# Altium PCB PCB1.PcbDoc (part 4 of 7)
Units mm, origin at the board's own origin, x right, y up, seen from the top; angles counter-clockwise.
Board outline 100 x 70 mm, 6 copper layers (Top Layer 1, GND_1, SIG, VCC, GND_2, Bottom Layer 1), stack 0.816 mm thick; 462 components, 328 nets, 2208 pads, 873 vias.
Unrouted connection lines stored in the file: 176.
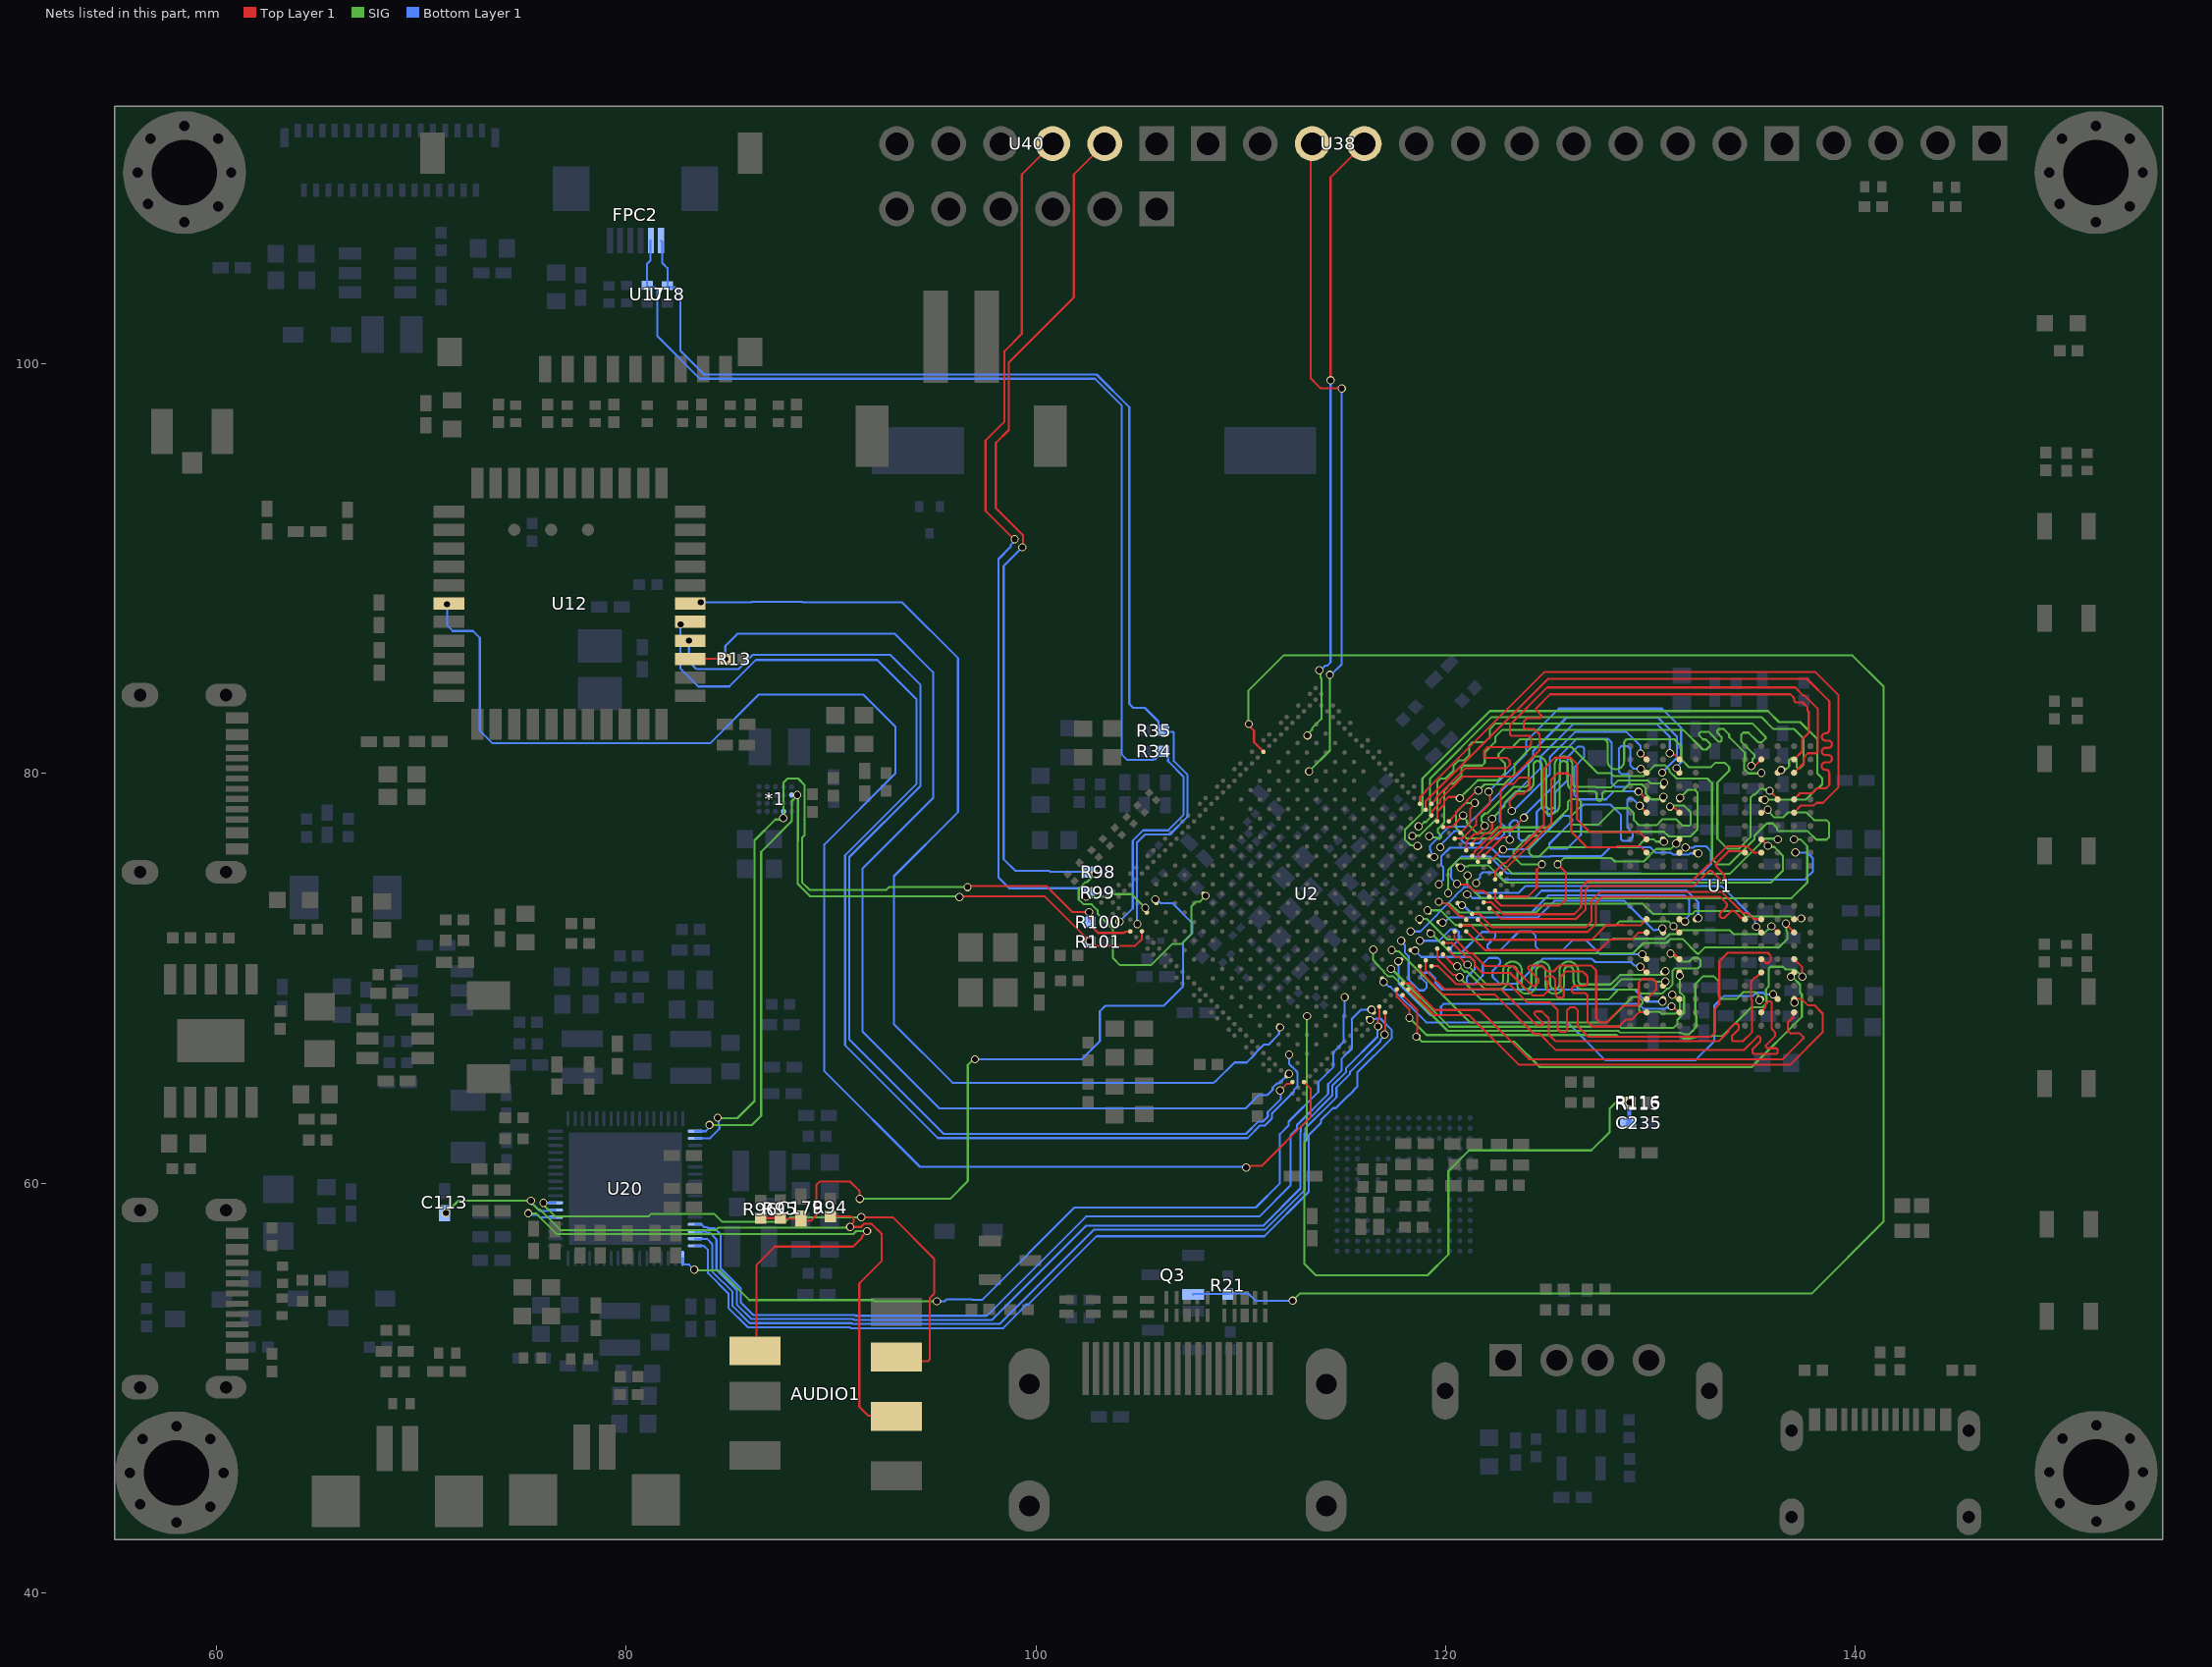
[diagram p8: the nets of this part, all layers, seen from the top]

## Via types
v1: diameter 0.4, hole 0.3, Top Layer 1 to Bottom Layer 1, tented both sides, 873 vias

## Nets (pads, with @x,y where several pads share a name; then routed paths per layer and width w, separated by ;. In a path a pad name is that pad's centre, name@x,y a point inside that pad or via, vN(x,y) a via of type N, cw(c..) or ccw(c..) an arc to the next point about the centre after c; other vN are vias at no path point) (continued)
HDMITX_SDA: Q3.2 R21.1 U2.AP11 | length 97.3
  Top Layer 1 w0.102: v1(110.398,82.413) 110.398,82.35 110.651,82.097 110.651,81.526 U2.AP11@111.118,81.059
  SIG w0.102: v1(110.398,82.413) 110.37,82.441 110.37,84.043 112.093,85.766 139.875,85.766 141.396,84.246 141.396,58.121 137.877,54.602 112.886,54.602 v1(112.537,54.254)
  Bottom Layer 1 w0.102: Q3.2@107.676,54.566 107.688,54.578 R21.1@109.374,54.578 109.406,54.61 110.363,54.61 110.719,54.254 v1(112.537,54.254)
HOST_WAKE_BT_H: U2.B36 U12.6 | length 76.4
  Top Layer 1 w0.102: v1(110.269,60.753) 110.326,60.81 110.475,60.81 110.508,60.843 111.029,60.843 113.411,63.225 113.411,64.624 U2.B36@113.098,64.937
  Bottom Layer 1 w0.102: v1(71.247,88.265) 71.247,87.239 71.526,86.961 72.517,86.961 72.848,86.63 72.848,82.092 73.463,81.477 84.082,81.477 86.458,83.852 91.568,83.852 93.148,82.272 93.148,80.019 89.668,76.539 89.668,65.465 94.335,60.797 110.225,60.797 v1(110.269,60.753)
HP_PLUG_IN_DET: C179.2 R95.1 R96.1 U2.1U19 | length 37
  Top Layer 1 w0.102: R96.1@86.564,58.291 87.515,58.291 R95.1@87.524,58.3 87.568,58.256 C179.2@88.519,58.256 88.609,58.166 89.028,58.166 89.282,58.42 89.282,59.912 89.441,60.071 90.932,60.071 91.397,59.606 v1(91.397,59.23)
  SIG w0.102: v1(91.397,59.23) 95.806,59.23 96.674,60.098 96.674,65.776 96.86,65.962 96.865,65.962 96.944,66.041 v1(97.025,66.041)
  Bottom Layer 1 w0.102: v1(97.025,66.041) 102.236,66.041 103.124,66.929 103.124,68.388 103.39,68.654 106.246,68.654 107.188,69.596 107.188,71.753 107.637,72.202 107.637,72.703 106.67,73.67 106.093,73.67 105.909,73.854 v1(105.829,73.854)
HP_SNS: AUDIO1.2 C113.2 R94.1 U20.40 | length 36.6
  Top Layer 1 w0.102: R94.1@89.967,58.374 90.578,58.374 90.582,58.378 90.974,58.378 91.108,58.244 91.108,58.099 90.987,57.979 90.987,57.881 v1@91.044,57.824 ; v1(90.93,57.858) 91.011,57.858 v1@91.044,57.824 ; AUDIO1.2@93.191,48.602 93.151,48.641 91.809,48.641 91.379,49.07 91.379,55.107 92.476,56.203 92.476,57.511 91.98,58.007 91.608,58.007 91.459,57.858 91.068,57.858 91.044,57.834 v1@91.044,57.824
  SIG w0.102: v1(71.196,58.536) 71.802,59.142 75.193,59.142 75.376,58.958 75.412,58.994 75.691,58.714 75.767,58.714 76.772,57.709 84.383,57.709 84.487,57.813 90.885,57.813 v1(90.93,57.858)
  Bottom Layer 1 w0.102: v1(75.345,59.142) 75.345,59.065 75.782,58.629 76.115,58.629 76.161,58.675 76.536,58.675 U20.40@76.545,58.684
HPL_OUT: AUDIO1.4 U20.39 | length 28.8
  Top Layer 1 w0.102: AUDIO1.4@86.291,51.802 86.36,51.871 86.36,56.007 87.249,56.896 91.078,56.896 91.511,57.328 91.511,57.4 91.754,57.644 v1(91.754,57.655)
  SIG w0.102: v1(75.21,58.521) 75.219,58.511 75.612,58.511 76.618,57.506 91.076,57.506 91.225,57.655 v1(91.754,57.655)
  Bottom Layer 1 w0.102: v1(75.21,58.521) 75.281,58.449 75.663,58.449 75.778,58.334 U20.39@76.545,58.334
HPR_OUT: AUDIO1.3 U20.41 | length 27.9
  Top Layer 1 w0.102: v1(91.472,58.332) 93.012,58.332 95.03,56.314 95.03,54.586 94.818,54.374 94.818,51.384 94.742,51.308 93.384,51.308 AUDIO1.3@93.191,51.502
  SIG w0.102: v1(75.949,59.031) 75.949,58.946 76.512,58.382 81.098,58.382 81.213,58.497 84.29,58.497 84.684,58.102 87.761,58.102 87.991,58.332 v1(91.472,58.332)
  Bottom Layer 1 w0.102: v1(75.949,59.031) 75.95,59.033 76.543,59.033 U20.41@76.545,59.034
HW_ID: C235.1 R115.1 R116.2 U2.1C17 | length 35.9
  SIG w0.102: v1(113.24,68.154) 113.235,68.15 113.235,62.099 113.109,61.973 113.109,56.055 113.665,55.499 119.126,55.499 120.142,56.515 120.142,60.579 121.158,61.595 127.127,61.595 128.016,62.484 128.016,63.627 128.329,63.94 v1(128.988,63.94)
  Bottom Layer 1 w0.203: C235.1@128.91,62.93 128.98,63 R115.1@128.98,63.881 128.98,63.933 v1(128.988,63.94)
I2C0_SCL_PMIC: *1.A3 R101.1 U2.AJ37 U20.1 | length 43
  Top Layer 1 w0.102: v1(96.273,73.968) 96.302,73.996 100.436,73.996 102.578,71.854 v1@102.578,71.782 ; v1(102.614,71.818) v1@102.578,71.782 ; U2.AJ37@105.179,72.291 105.179,71.92 104.845,71.587 102.881,71.587 102.685,71.782 v1@102.578,71.782
  SIG w0.102: v1(84.06,62.837) 84.073,62.825 86.117,62.825 86.583,63.29 86.583,76.178 88.078,77.674 88.078,78.651 88.311,78.883 v1@88.311,78.911 ; v1(88.349,78.949) v1@88.311,78.911 ; v1(96.273,73.968) 96.234,74.007 88.967,74.007 88.376,74.599 88.376,76.714 88.382,76.721 88.382,78.84 v1@88.311,78.911
  Bottom Layer 1 w0.102: U20.1@83.36,62.534 83.882,62.534 84.003,62.655 84.003,62.78 v1(84.06,62.837)
I2C0_SDA_PMIC: *1.B1 R100.1 U2.AK38 U20.2 | length 44.5
  Top Layer 1 w0.102: v1(96.663,74.454) 96.707,74.497 100.52,74.497 101.783,73.234 v1(102.599,73.234) 102.656,73.177 102.656,72.921 102.746,72.831 102.746,72.514 103.042,72.218 104.317,72.218 104.369,72.27 104.592,72.27 U2.AK38@104.613,72.291
  SIG w0.102: v1(84.462,63.188) 84.486,63.164 85.421,63.164 86.26,64.004 86.26,76.737 87.275,77.752 87.588,77.752 87.672,77.836 87.672,79.544 87.884,79.756 88.392,79.756 88.701,79.447 88.701,76.983 88.586,76.867 88.586,76.637 88.579,76.63 88.579,74.683 88.941,74.32 92.695,74.32 92.828,74.454 v1(96.663,74.454)
  Bottom Layer 1 w0.102: U20.2@83.36,62.184 83.367,62.192 84.095,62.192 84.547,62.644 84.547,62.818 84.519,62.847 84.519,63.131 v1(84.462,63.188) ; v1(102.599,73.234) 102.599,72.769 R100.1@102.615,72.754
  other v1: 87.664,77.829
I2C1_SCL_TP: FPC2.6 R35.1 U2.AK37 U18.2 | length 57.8
  Bottom Layer 1 w0.102: FPC2.6@81.697,106.031 81.762,105.966 81.762,104.928 82.011,104.679 U18.2@82.011,103.822 82.083,103.75 82.379,103.75 82.634,103.495 82.634,100.662 83.811,99.485 102.966,99.485 104.561,97.891 104.561,83.399 104.75,83.21 105.319,83.21 105.99,82.54 105.99,82.321 106.209,82.102 R35.1@106.222,82.102 106.282,82.042 106.681,82.042 106.741,81.982 106.741,80.606 107.409,79.937 107.409,77.889 106.542,77.022 105.323,77.022 104.933,76.632 104.933,72.672 v1(104.961,72.644)
I2C1_SDA_TP: FPC2.5 R34.1 U2.AM38 U17.2 | length 59.3
  Bottom Layer 1 w0.102: FPC2.5@81.197,106.031 81.18,106.013 81.18,105.056 81.013,104.889 U17.2@81.013,103.828 81.083,103.759 81.407,103.759 81.51,103.656 81.51,101.363 83.591,99.282 102.882,99.282 104.184,97.981 104.184,80.941 104.463,80.662 105.702,80.662 105.745,80.705 105.83,80.705 106.209,81.084 106.235,81.084 106.454,80.865 106.454,80.605 107.206,79.853 107.206,77.974 106.457,77.225 105.239,77.225 104.73,76.717 104.73,73.417 v1(104.087,72.774)
I2C2_SCL_M0: R99.1 U2.1U20 U40.3 | length 46.4
  Top Layer 1 w0.102: v1(98.967,91.44) 98.925,91.44 97.536,92.829 97.536,96.266 98.47,97.2 98.47,100.629 99.314,101.473 99.314,109.253 U40.3@100.822,110.761
  SIG w0.102: v1(102.447,73.986) 103.536,73.986 103.662,74.112 104.671,74.112 v1(105.34,73.443)
  Bottom Layer 1 w0.102: v1(98.967,91.44) 98.967,91.359 98.767,91.16 98.767,91.069 98.171,90.473 98.171,74.93 98.704,74.397 102.398,74.397 R99.1@102.6,74.194 102.6,74.139 v1(102.447,73.986)
I2C2_SDA_M0: R98.1 U2.1R16 U40.2 | length 54.8
  Top Layer 1 w0.102: v1(99.339,91.049) 99.365,91.075 99.365,91.643 98.044,92.964 98.044,96.139 98.679,96.774 98.679,100.076 101.854,103.251 101.854,109.253 U40.2@103.362,110.761
  SIG w0.102: v1(102.896,75.086) 102.512,74.703 102.422,74.703 102.095,74.376 102.095,73.84 102.325,73.61 102.721,73.61 103.013,73.319 103.013,73.163 103.759,72.417 103.759,70.993 104.113,70.639 105.619,70.639 106.666,71.685 107.12,71.685 107.598,72.164 107.598,73.524 107.821,73.746 108.014,73.746 v1(108.293,74.026)
  Bottom Layer 1 w0.102: v1(99.339,91.049) 98.425,90.135 98.425,75.819 98.994,75.25 100.66,75.25 100.716,75.194 R98.1@102.615,75.194
I2C3_SCL_M1: U2.1T4 U38.3 | length 32.6
  Top Layer 1 w0.102: U38.3@113.498,110.761 113.411,110.674 113.411,99.314 113.919,98.806 v1(114.935,98.806)
  SIG w0.102: v1(113.343,80.105) 114.358,81.12 v1(114.358,84.819)
  Bottom Layer 1 w0.102: v1(114.358,84.819) 114.41,84.819 114.935,85.344 v1(114.935,98.806)
I2C3_SDA_M1: U2.1V2 U38.4 | length 30.2
  Top Layer 1 w0.102: v1(114.388,99.202) 114.388,109.111 U38.4@116.038,110.761
  SIG w0.102: v1(113.257,81.861) 113.257,81.907 113.483,82.133 113.483,82.205 113.943,82.666 113.943,84.639 113.893,84.689 113.893,84.987 v1(113.837,85.042)
  Bottom Layer 1 w0.102: v1(113.837,85.042) 113.889,85.042 114.112,85.265 114.221,85.265 114.388,85.432 v1(114.388,99.202)
I2S1_LRCK_TX_M0_PMIC: U2.B24 U20.14 | length 45.5
  Bottom Layer 1 w0.102: U20.14@83.36,57.984 83.668,57.984 83.815,57.837 83.945,57.837 83.99,57.792 84.311,57.792 84.604,57.499 84.604,55.847 85.591,54.859 85.591,54.159 86.187,53.563 91.16,53.563 91.203,53.521 97.604,53.521 102.45,58.367 110.915,58.367 112.437,59.889 112.437,62.339 112.746,62.648 112.746,62.833 114.274,64.36 114.274,64.84 114.935,65.501 114.935,66.073 115.434,66.572 115.434,68.015 115.888,68.47 v1(116.387,68.47)
I2S1_MCLK_M0_PMIC: U2.A23 U20.16 | length 45.7
  Top Layer 1 w0.102: v1(117.03,67.26) 117.062,67.292 117.062,67.836 117.058,67.84 U2.A23@117.058,68.331
  Bottom Layer 1 w0.102: U20.16@83.36,57.284 83.367,57.277 83.947,57.277 84.192,57.032 84.192,55.684 85.185,54.691 85.185,53.99 86.018,53.157 90.992,53.157 91.034,53.114 98.222,53.114 102.825,57.717 111.184,57.717 113.12,59.653 113.12,62.424 113.153,62.457 113.153,62.664 114.68,64.192 114.68,64.671 115.341,65.333 115.341,65.43 116.816,66.905 116.816,66.977 117.03,67.191 v1(117.03,67.26)
I2S1_SCLK_TX_M0_PMIC: U2.B23 U20.15 | length 45.8
  Top Layer 1 w0.102: v1(116.71,67.646) 116.71,68.017 116.775,68.083 U2.B23@116.775,68.614
  Bottom Layer 1 w0.102: U20.15@83.36,57.634 83.861,57.634 83.906,57.589 84.06,57.589 84.401,57.247 84.401,55.762 85.388,54.775 85.388,54.074 86.103,53.36 91.076,53.36 91.118,53.318 97.857,53.318 102.46,57.92 111.1,57.92 112.917,59.737 112.917,62.509 112.949,62.541 112.949,62.748 114.477,64.276 114.477,64.755 115.138,65.417 115.138,65.604 116.678,67.144 116.678,67.614 v1(116.71,67.646)
I2S1_SDI0_M0/PDM: U2.1B14 U20.18 | length 43
  SIG w0.102: v1(83.317,55.776) 83.354,55.738 84.552,55.738 86.005,54.286 92.064,54.286 92.122,54.228 v1(95.17,54.228)
  Bottom Layer 1 w0.102: U20.18@82.752,56.327 82.752,56.045 82.775,56.022 82.982,56.022 82.988,56.016 83.059,56.016 83.3,55.776 v1(83.317,55.776) ; v1(95.17,54.228) 95.541,54.228 95.641,54.328 96.856,54.328 96.894,54.291 97.374,54.291 101.885,58.801 110.735,58.801 111.918,59.983 111.918,62.394 112.34,62.816 112.34,63.001 113.791,64.452 113.791,64.932 114.529,65.669 114.529,66.389 115.027,66.888 115.027,68.184 115.078,68.235 v1(115.078,69.074)
I2S1_SDO0_MO_PMIC: U2.B25 U20.17 | length 46.5
  Bottom Layer 1 w0.102: U20.17@83.36,56.934 83.782,56.934 83.989,56.727 83.989,55.6 84.982,54.607 84.982,53.906 85.934,52.954 90.908,52.954 90.95,52.911 98.405,52.911 99.293,53.799 99.293,53.833 99.531,54.071 99.626,54.071 102.959,57.404 111.158,57.404 113.323,59.569 113.323,62.34 113.914,62.931 113.914,63.069 114.505,63.659 114.643,63.659 115.277,64.294 115.299,64.294 115.506,64.5 115.506,64.523 115.699,64.716 115.699,65.407 117.383,67.091 117.383,67.472 116.822,68.032 116.619,68.032 116.602,68.016 116.374,68.016 v1(116.317,67.959)
I2S2_LRCK_TX_M0: U2.1D19 U12.28 | length 54.2
  Bottom Layer 1 w0.102: v1(83.639,88.364) 86.114,88.364 86.143,88.393 88.592,88.393 88.632,88.353 93.476,88.353 96.196,85.633 96.196,78.118 93.066,74.988 93.066,67.76 95.929,64.897 108.679,64.897 108.755,64.973 108.788,64.973 109.703,65.888 110.299,65.888 110.71,66.299 110.71,66.347 111.122,66.758 111.358,66.758 111.872,67.273 111.872,67.548 v1(111.929,67.605)
I2S2_SCLK_TX_M0: U2.C37 U12.26 | length 57.2
  Top Layer 1 w0.102: v1(111.916,64.517) 112.238,64.839 112.397,64.839 112.497,64.939 U2.C37@112.529,64.939
  Bottom Layer 1 w0.102: v1(83.058,86.487) 83.058,85.471 83.425,85.104 85.485,85.104 86.179,85.798 92.891,85.798 94.367,84.322 94.367,79.4 90.887,75.919 90.887,67.012 95.498,62.4 110.252,62.4 110.86,63.008 111.095,63.008 111.324,63.237 111.324,63.472 111.966,64.114 111.966,64.467 v1(111.916,64.517)
I2S2_SDI_M0: R13.1 U2.D37 U12.25 | length 55.6
  Top Layer 1 w0.102: U12.25@83.119,85.601 83.122,85.598 v1(84.836,85.598)
  Bottom Layer 1 w0.102: v1(84.836,85.598) 84.836,86.229 85.437,86.83 93.098,86.83 94.977,84.952 94.977,78.799 91.535,75.358 91.535,67.39 95.278,63.647 110.246,63.647 110.898,64.299 111.308,64.299 111.564,64.555 111.564,64.663 111.77,64.87 111.878,64.87 112.345,65.336 v1(112.361,65.336)
I2S2_SDO_M0: U2.1B20 U12.27 | length 60.6
  Bottom Layer 1 w0.102: v1(82.649,87.282) 82.649,85.118 83.515,84.252 85.033,84.252 86.327,85.546 92.254,85.546 94.164,83.636 94.164,79.484 90.684,76.003 90.684,66.732 95.218,62.197 110.337,62.197 110.944,62.805 111.179,62.805 111.527,63.153 111.527,63.387 112.601,64.461 112.601,64.545 112.776,64.721 112.776,65.405 112.713,65.468 112.713,65.482 112.547,65.648 112.53,65.648 112.363,65.815 v1(112.363,66.268)
LPDDR4_A0_A: U1.H2 U2.C2 | length 14.9
  Top Layer 1 w0.102: U2.C2@122.432,74.837 122.432,75.213 122.858,75.639 122.942,75.639 124.809,77.506 124.809,80.232 125.349,80.772 126.111,80.772 126.424,80.459 126.424,77.76 127.041,77.143 128.37,77.143 128.379,77.134 129.476,77.134 U1.H2@129.824,76.787
LPDDR4_A0_B: U1.R2 U2.A9 | length 9.5
  Top Layer 1 w0.102: U2.A9@121.018,72.291 121.929,71.38 127.514,71.38 128.023,71.889 128.263,71.889 128.297,71.923 129.138,71.923 129.451,72.237 U1.R2@129.824,72.237
LPDDR4_A1_A: U1.J2 U2.C1 | length 13.6
  Top Layer 1 w0.102: U2.C1@122.715,75.119 125.166,77.57 125.166,79.7 125.471,80.005 125.989,80.005 126.139,79.855 126.139,77.167 126.905,76.401 128.333,76.401 128.371,76.439 129.521,76.439 U1.J2@129.824,76.137
LPDDR4_A1_B: U1.P2 U2.B9 | length 9.8
  Top Layer 1 w0.102: U2.B9@120.735,72.574 121.246,72.574 121.937,71.882 127.136,71.882 127.852,72.598 128.68,72.598 128.693,72.584 129.521,72.584 U1.P2@129.824,72.887
LPDDR4_A2_A: U1.H9 U2.1C1 | length 18.5
  Top Layer 1 w0.102: U1.H9@135.424,76.787 135.429,76.787 135.747,76.469 v1(135.752,76.469)
  SIG w0.102: v1(120.745,75.401) 120.802,75.457 121.098,75.457 121.148,75.508 122.104,75.508 122.936,74.676 135.89,74.676 136.483,75.269 136.483,75.988 136.059,76.412 135.809,76.412 v1(135.752,76.469)
LPDDR4_A2_B: U1.R9 U2.1B7 | length 19.4
  Top Layer 1 w0.102: v1(135.169,72.514) 135.169,72.502 135.424,72.248 U1.R9@135.424,72.237
  Bottom Layer 1 w0.102: v1(118.296,72.291) 118.769,72.291 120.487,74.009 120.487,74.034 120.905,74.452 121.197,74.452 121.477,74.172 123.575,74.172 123.918,74.515 133.464,74.515 135.113,72.866 135.113,72.57 v1(135.169,72.514)
LPDDR4_A3_A: U1.H10 U2.1B3 | length 18.5
  SIG w0.102: v1(120.135,74.155) 120.134,75.288 120.701,75.855 122.519,75.855 123.261,75.113 133.897,75.113 135.606,76.822 136.178,76.822 v1@136.218,76.781
  other v1: 136.224,76.787
LPDDR4_A3_B: U1.R10 U2.1B6 | length 18.5
  Top Layer 1 w0.102: v1(135.915,72.543) 135.918,72.543 U1.R10@136.224,72.237
  SIG w0.102: v1(118.731,72.903) 118.733,72.9 119.084,72.9 120.091,71.893 128.144,71.893 128.18,71.93 130.713,71.93 130.843,72.06 130.846,72.06 130.942,72.156 131.354,72.156 131.544,72.346 133.872,72.346 134.057,72.161 135.533,72.161 v1(135.915,72.543)
LPDDR4_A4_A: U1.H11 U2.1B1 | length 20.2
  SIG w0.102: v1(121.075,75.023) 121.053,75.001 121.053,74.596 121.735,73.914 136.906,73.914 137.668,74.676 137.668,76.454 137.335,76.787 v1(137.024,76.787)
LPDDR4_A4_B: U1.R11 U2.1A6 | length 20.1
  Top Layer 1 w0.102: v1(136.622,72.673) 136.622,72.656 137.024,72.254 U1.R11@137.024,72.237
  SIG w0.102: v1(119.286,72.184) 119.322,72.184 120.287,71.218 129.164,71.218 129.672,71.727 130.8,71.727 130.995,71.921 131.571,71.921 132.283,71.208 132.368,71.208 132.675,71.516 136.286,71.516 136.703,71.933 136.703,72.27 136.652,72.321 136.652,72.643 v1(136.622,72.673)
LPDDR4_A5_A: U1.J11 U2.1A1 | length 18.7
  Bottom Layer 1 w0.102: v1(121.498,74.649) 121.498,74.73 121.684,74.916 121.684,75.034 121.834,75.184 122.428,75.184 122.79,74.822 137.547,74.822 137.945,75.22 137.945,75.854 137.656,76.143 v1(137.088,76.143)
LPDDR4_A5_B: U1.P11 U2.B8 | length 20.6
  Top Layer 1 w0.102: v1(119.675,73.741) 119.751,73.664 120.049,73.664 120.671,73.043 120.828,73.043 U2.B8@121.014,72.858 U2.B8@121.016,72.857 ; U1.P11@137.024,72.887 137.043,72.906 137.352,72.906 v1(137.372,72.926)
  SIG w0.102: v1(119.675,73.741) 119.751,73.664 120.062,73.664 120.089,73.638 120.233,73.638 120.658,73.214 124.419,73.214 124.843,73.638 129.644,73.638 130.145,73.137 132.049,73.137 132.202,73.29 134.402,73.29 134.677,73.015 136.146,73.015 136.157,73.025 136.851,73.025 136.969,72.908 137.354,72.908 v1(137.372,72.926)
LPDDR4_CKE0_A: U1.J4 U2.B4 | length 18.7
  Top Layer 1 w0.102: v1(120.565,74.61) 120.594,74.58 121.069,74.58 121.387,74.262 121.867,74.262 121.957,74.172 121.965,74.172 U2.B4@122.149,73.988 ; U1.J4@131.424,76.137 131.45,76.137 131.697,76.383 v1(131.724,76.383)
  Bottom Layer 1 w0.102: v1(120.565,74.61) 120.269,74.905 120.269,75.423 120.798,75.953 122.167,75.953 122.991,75.129 129.511,75.129 129.527,75.113 132.517,75.113 132.969,75.565 132.969,76.2 132.714,76.455 132.188,76.455 132.116,76.383 v1(131.724,76.383)
LPDDR4_CKE0_B: U1.P4 U2.1A3 | length 12.8
  Bottom Layer 1 w0.102: v1(120.8,73.57) 120.875,73.57 121.231,73.214 124.205,73.214 125.047,74.055 131.681,74.055 131.898,73.838 131.898,73.06 131.693,72.855 v1(131.693,72.774)
LPDDR4_CKE1_A: U1.J5 U2.1C3 | length 14.8
  Bottom Layer 1 w0.102: v1(119.674,74.589) 119.888,74.803 119.888,75.438 119.797,75.529 119.797,75.948 120.227,76.378 122.231,76.378 122.667,75.943 125.135,75.943 125.166,75.974 127.634,75.974 128.069,76.408 129.987,76.408 130.259,76.137 131.011,76.137 131.117,76.031 131.87,76.031 131.941,76.103 v1(132.354,76.103)
LPDDR4_CKE1_B: U1.P5 U2.1A2 | length 12.5
  Bottom Layer 1 w0.102: v1(121.051,74.099) 121.132,74.099 121.313,73.918 124.336,73.918 124.698,74.28 131.78,74.28 132.348,73.712 v1(132.348,72.937)
LPDDR4_CLK_A_N: U1.J9 U2.B5 | length 15.9
  Top Layer 1 w0.102: U2.B5@121.867,73.705 121.868,73.707 122.242,73.707 122.822,73.127 126.288,73.127 126.619,73.458 126.619,74.422 126.94,74.743 132.038,74.743 133.734,76.439 134.749,76.439 135.051,76.137 U1.J9@135.424,76.137
LPDDR4_CLK_A_P: U1.J8 U2.A5 | length 16
  Top Layer 1 w0.102: U2.A5@122.149,73.422 122.18,73.422 122.234,73.368 122.257,73.368 122.727,72.898 126.382,72.898 126.848,73.363 126.848,74.327 127.035,74.514 132.132,74.514 132.568,74.95 132.82,75.201 cw(c132.927,75.094) 133.035,75.201 133.371,74.866 ccw(c133.479,74.973) 133.586,74.866 ccw(c133.479,74.973) 133.586,75.081 133.251,75.417 cw(c133.358,75.525) 133.251,75.632 133.611,75.993 133.829,76.211 134.496,76.211 134.57,76.137 U1.J8@134.624,76.137
LPDDR4_CLK_B_N: U1.P9 U2.B7 | length 16.3
  Top Layer 1 w0.102: U2.B7@121.301,73.139 121.303,73.141 121.668,73.141 121.91,72.9 121.91,72.858 122.276,72.492 126.848,72.492 127.127,72.771 127.127,73.787 127.554,74.214 133.498,74.214 134.456,73.256 134.523,73.189 134.749,73.189 135.051,72.887 U1.P9@135.424,72.887
LPDDR4_CLK_B_P: U1.P8 U2.A7 | length 16.1
  Top Layer 1 w0.102: U2.A7@121.588,72.857 122.181,72.263 126.942,72.263 127.356,72.676 127.356,73.692 127.649,73.985 133.403,73.985 133.453,73.935 133.705,73.684 cw(c133.597,73.576) 133.705,73.469 133.438,73.202 ccw(c133.546,73.094) 133.438,72.987 ccw(c133.546,73.094) 133.654,72.987 133.92,73.253 cw(c134.028,73.145) 134.136,73.253 134.334,73.055 134.361,73.027 134.428,72.96 134.496,72.96 134.57,72.887 U1.P8@134.624,72.887
LPDDR4_CS0n_A: U1.H4 U2.B3 | length 12.4
  Top Layer 1 w0.102: U2.B3@122.432,74.271 122.432,73.82 122.7,73.552 125.578,73.552 125.883,73.858 125.883,75.158 v1(125.476,75.565)
  SIG w0.102: v1(125.476,75.565) 125.778,75.867 128.115,75.867 128.279,75.704 129.679,75.704 130.289,76.314 130.997,76.314 v1(131.262,76.579)
LPDDR4_CS0n_B: U1.R4 U2.1B5 | length 12.9
  Top Layer 1 w0.102: v1(131.138,72.536) 131.138,72.529 131.424,72.244 U1.R4@131.424,72.237
  SIG w0.102: v1(119.128,73.319) 119.765,73.319 120.485,72.598 128.323,72.598 128.512,72.787 130.888,72.787 v1(131.138,72.536)
LPDDR4_CS1n_A: U1.H3 U2.A3 | length 14.6
  Top Layer 1 w0.102: U2.A3@122.715,73.988 124.026,73.988 124.46,74.422 124.46,75.311 v1(124.714,75.565)
  SIG w0.102: v1(124.714,75.565) 123.698,75.565 123.317,75.946 123.317,76.2 124.079,76.962 124.466,76.962 124.526,76.902 124.526,76.818 124.079,76.371 124.079,76.122 124.255,75.946 124.587,75.946 125.042,76.401 127.451,76.401 127.459,76.408 129.367,76.408 129.746,76.787 130.172,76.787 130.284,76.674 130.655,76.674 v1(130.662,76.667)
LPDDR4_CS1n_B: U1.R3 U2.1A5 | length 11.8
  Bottom Layer 1 w0.102: v1(119.861,72.724) 119.937,72.724 120.184,72.971 124.515,72.971 125.322,73.778 128.734,73.778 130.161,72.351 130.263,72.351 130.289,72.377 130.541,72.377 v1(130.598,72.434)
LPDDR4_DM0_A: U1.C3 U2.1E2 | length 18
  Bottom Layer 1 w0.102: v1(119.445,75.919) 119.445,76 119.289,76.156 119.289,76.239 119.238,76.29 119.238,76.465 120.173,77.4 120.976,77.4 124.277,80.702 124.277,81.097 125.906,82.726 130.38,82.726 131.305,81.801 131.305,80.776 130.586,80.058 v1(130.586,80.043)
LPDDR4_DM0_B: U1.Y3 U2.1B8 | length 16.4
  Bottom Layer 1 w0.102: v1(117.836,71.831) 117.836,71.797 118.016,71.616 118.016,71.256 118.203,71.069 118.203,69.936 118.729,69.411 118.948,69.411 119.073,69.536 119.073,69.776 118.806,70.043 118.806,70.127 118.95,70.272 119.23,70.272 119.507,69.995 119.507,69.786 119.842,69.45 129.222,69.45 129.812,68.86 v1(130.595,68.86)
LPDDR4_DM1_A: U1.C10 U2.1G1 | length 25.9
  SIG w0.102: v1(118.689,77.413) 118.75,77.413 118.968,77.632 119.04,77.632 119.253,77.844 119.253,79.756 122.255,82.758 135.428,82.758 136.017,82.169 137.033,82.169 137.49,81.712 137.49,80.44 137.304,80.253 137.22,80.253 137.16,80.313 137.16,80.707 137.1,80.766 136.892,80.766 136.779,80.653 136.779,80.349 136.655,80.225 136.447,80.225 v1(136.39,80.168)
LPDDR4_DM1_B: U1.Y10 U2.1A11 | length 23.3
  Top Layer 1 w0.102: v1(136.004,69.215) 136.004,69.211 136.224,68.991 U1.Y10@136.224,68.987
  Bottom Layer 1 w0.102: v1(116.981,69.817) 117.02,69.817 117.25,69.588 117.322,69.588 119.064,67.845 125.957,67.845 127.796,66.006 132.204,66.006 133.122,66.925 133.122,68.653 133.61,69.141 135.016,69.141 135.166,69.29 135.429,69.29 135.433,69.294 135.517,69.294 135.596,69.215 v1(136.004,69.215)
LPDDR4_DQ0_A: U1.B2 U2.G2 | length 17.2
  Top Layer 1 w0.102: U2.G2@121.301,75.968 121.301,76.005 121.397,76.102 121.397,76.163 122.098,76.863 122.126,76.863 122.701,77.438 122.701,79.212 122.974,79.485 123.3,79.485 123.627,79.812 124.041,79.812 124.1,79.753 124.1,79.289 123.816,79.005 123.471,79.005 123.134,78.669 123.134,78.474 123.177,78.432 123.177,78.23 v1(123.234,78.173) ; v1@129.529,80.981 U1.B2@129.824,80.687
  Bottom Layer 1 w0.102: v1(123.234,78.173) 123.312,78.173 125.095,79.956 125.095,80.797 126.326,82.028 128.843,82.028 129.528,81.343 v1(129.528,80.981)
LPDDR4_DQ0_B: U1.AA2 U2.B12 | length 18.2
  Top Layer 1 w0.102: U2.B12@119.887,71.725 120.335,71.725 121.035,71.025 121.222,71.025 121.428,70.819 121.428,70.632 121.794,70.266 123.155,70.266 124.269,69.152 124.778,69.152 124.968,69.342 124.968,69.85 124.883,69.935 124.883,70.019 124.968,70.104 125.222,70.104 125.349,69.977 125.349,69.215 125.497,69.067 125.72,69.067 125.78,69.127 125.78,69.428 125.623,69.585 125.623,70.071 125.896,70.344 126.689,70.344 126.817,70.216 126.867,70.165 126.943,70.089 126.943,69.809 cw(c126.765,69.809) 126.767,69.631 126.33,69.627 ccw(c126.332,69.45) 126.154,69.448 ccw(c126.332,69.45) 126.333,69.272 126.764,69.275 cw(c126.765,69.098) 126.943,69.098 126.943,68.791 126.943,67.875 127.181,67.637 128.47,67.637 128.822,67.989 129.104,67.989 129.451,68.337 U1.AA2@129.824,68.337
LPDDR4_DQ1_A: U1.C2 U2.F2 | length 17.6
  Top Layer 1 w0.102: U2.F2@121.584,75.685 121.601,75.702 121.601,76.078 122.182,76.66 122.21,76.66 122.791,77.241 123.228,77.241 v1(123.829,77.842) ; v1(129.538,80.224) 129.587,80.224 129.774,80.037 U1.C2@129.824,80.037
  Bottom Layer 1 w0.102: v1(123.829,77.842) 123.858,77.871 123.858,77.96 125.603,79.705 125.603,80.887 126.401,81.685 127.952,81.685 128.112,81.525 128.112,79.528 128.288,79.352 128.816,79.352 128.985,79.521 128.985,79.882 128.892,79.975 128.586,79.975 128.482,80.079 128.482,81.232 128.584,81.334 128.899,81.334 129.032,81.201 129.032,80.391 129.186,80.237 129.524,80.237 v1(129.538,80.224)
LPDDR4_DQ1_B: U1.Y2 U2.B10 | length 18.1
  Top Layer 1 w0.102: U2.B10@120.452,72.291 120.449,72.288 120.449,71.922 121.14,71.23 121.304,71.23 121.937,70.597 123.274,70.597 124.264,69.607 124.348,69.607 124.533,69.792 124.533,69.968 124.048,70.454 124.048,70.538 124.127,70.617 124.709,70.617 124.991,70.335 125.283,70.335 125.569,70.621 127.118,70.621 127.359,70.38 127.359,68.047 127.566,67.84 127.857,67.84 128.682,68.665 129.385,68.665 129.444,68.725 129.444,69.79 129.618,69.964 130.128,69.964 130.302,69.79 130.302,69.465 129.877,69.04 129.877,68.987 U1.Y2@129.824,68.987
LPDDR4_DQ2_A: U1.E2 U2.F1 | length 17.7
  Top Layer 1 w0.102: U2.F1@121.867,75.968 122.775,76.876 123,76.876 123.101,76.775 v1(123.142,76.775) ; v1(129.428,79.113) 129.438,79.113 129.814,78.737 U1.E2@129.824,78.737
  Bottom Layer 1 w0.102: v1(123.142,76.775) 123.142,77.549 123.317,77.724 123.444,77.724 123.571,77.597 123.571,76.835 123.684,76.722 123.966,76.722 124.46,77.216 124.46,78.125 124.688,78.353 124.908,78.353 124.968,78.294 124.968,77.986 125.028,77.927 125.112,77.927 125.359,78.174 125.359,79.078 125.955,79.674 125.955,80.797 126.48,81.323 126.681,81.323 126.764,81.24 126.764,80.79 126.297,80.323 126.297,78.935 126.498,78.734 127.843,78.734 128.248,79.139 129.402,79.139 v1(129.428,79.113)
LPDDR4_DQ2_B: U1.V2 U2.1A8 | length 16.3
  Top Layer 1 w0.102: v1(129.519,70.565) 129.532,70.565 129.811,70.287 U1.V2@129.824,70.287
  Bottom Layer 1 w0.102: v1(118.518,71.347) 118.822,71.044 121.203,71.044 121.428,70.819 121.428,70.445 121.042,70.059 121.042,69.783 121.101,69.723 121.412,69.723 121.82,70.131 121.82,70.699 122.114,70.993 122.555,70.993 122.682,70.866 122.682,70.739 122.302,70.359 122.302,70.072 122.63,69.744 123.536,69.744 124.746,70.953 127.156,70.953 127.32,70.79 129.056,70.79 129.223,70.622 129.462,70.622 v1(129.519,70.565)
LPDDR4_DQ3_A: U1.F2 U2.E1 | length 17.3
  Top Layer 1 w0.102: U2.E1@122.149,75.685 122.759,76.295 v1(122.813,76.295) ; v1(129.486,78.419) 129.489,78.419 129.821,78.087 U1.F2@129.824,78.087
  Bottom Layer 1 w0.102: v1(122.813,76.295) 124.079,76.295 125.718,77.935 126.023,77.935 126.189,77.769 126.189,77.685 125.073,76.569 125.073,76.395 125.133,76.335 125.95,76.335 126.619,77.005 126.619,78.359 126.746,78.486 128.055,78.486 128.104,78.437 128.111,78.437 128.577,77.97 128.577,76.782 128.651,76.708 128.973,76.708 129.141,76.876 129.141,77.107 128.875,77.373 128.875,78.701 128.935,78.76 129.145,78.76 v1(129.486,78.419)
LPDDR4_DQ3_B: U1.U2 U2.1A7 | length 16.3
  Top Layer 1 w0.102: v1(129.616,71.172) 129.616,71.158 129.824,70.951 U1.U2@129.824,70.937
  Bottom Layer 1 w0.102: v1(118.755,71.831) 119.688,71.831 120.247,72.39 120.523,72.39 120.65,72.263 120.65,71.882 120.269,71.501 120.269,71.307 120.329,71.247 120.777,71.247 121.793,72.263 122.368,72.263 122.428,72.203 122.428,72.009 122.047,71.628 122.047,71.501 122.174,71.374 122.682,71.374 123.61,72.302 124.185,72.302 124.394,72.093 124.394,71.563 124.584,71.374 125.73,71.374 126.238,71.882 126.845,71.882 127.555,71.173 v1(129.616,71.172)
LPDDR4_DQ4_A: U1.F4 U2.M2 | length 19
  Top Layer 1 w0.102: U2.M2@119.887,77.382 120.308,77.382 120.585,77.659 120.585,77.676 v1(120.862,77.953) ; v1(130.963,78.384) 131.02,78.327 131.183,78.327 U1.F4@131.424,78.087
  SIG w0.102: v1(120.862,77.953) 120.862,77.872 121.054,77.68 121.054,77.574 121.54,77.088 122.266,77.088 122.547,77.368 125.087,77.368 125.984,78.265 125.984,78.613 126.111,78.74 126.492,78.74 126.619,78.613 126.619,78.397 126.096,77.874 126.096,77.606 126.208,77.494 127.454,77.494 128.263,78.303 128.961,78.303 129.197,78.067 129.197,77.729 129.456,77.47 130.302,77.47 130.604,77.772 131.257,77.772 131.578,77.452 131.921,77.452 131.98,77.511 131.98,78.101 131.651,78.43 131.009,78.43 v1(130.963,78.384)
LPDDR4_DQ4_B: U1.U4 U2.B13 | length 18
  Top Layer 1 w0.102: U2.B13@119.604,71.442 119.604,70.945 120.388,70.162 120.51,70.162 120.609,70.062 v1(120.69,70.062) ; v1(130.988,71.204) 131.045,71.147 131.206,71.147 131.416,70.937 U1.U4@131.424,70.937
  SIG w0.102: v1(120.69,70.062) 120.69,70.026 121.755,68.961 127.952,68.961 128.441,69.45 129.355,69.45 129.553,69.252 130.57,69.252 130.806,69.488 130.881,69.488 131.092,69.699 131.092,70.379 131.198,70.485 132.334,70.485 132.461,70.612 132.461,70.866 132.334,70.993 132.08,70.993 131.899,70.812 131.421,70.812 131.029,71.204 v1(130.988,71.204)
LPDDR4_DQ5_A: U1.E4 U2.K1 | length 19
  Top Layer 1 w0.102: U2.K1@120.735,77.099 121.215,77.579 121.215,78.281 121.431,78.497 v1(121.431,78.564) ; U1.E4@131.424,78.737 131.424,78.786 v1(131.461,78.824)
  SIG w0.102: v1(121.431,78.564) 120.975,78.564 120.51,78.099 120.51,77.356 121.031,76.835 122.301,76.835 122.631,77.165 126.792,77.165 126.804,77.153 130.673,77.153 130.9,76.926 131.192,76.926 131.197,76.931 131.975,76.931 132.305,77.261 132.305,79.082 132.186,79.201 131.838,79.201 v1(131.461,78.824)
LPDDR4_DQ5_B: U1.V4 U2.1A10 | length 17.8
  SIG w0.102: v1(117.337,70.453) 117.376,70.453 120.192,67.637 128.53,67.637 128.595,67.572 131.127,67.572 131.333,67.779 131.333,67.989 131.648,68.304 131.648,69.117 131.44,69.326 131.44,70.112 v1(131.444,70.117)
LPDDR4_DQ6_A: U1.C4 U2.K2 | length 17.4
  Top Layer 1 w0.102: U2.K2@120.452,76.816 120.473,76.837 120.844,76.837 121.491,77.485 121.491,77.853 122.171,78.533 122.171,78.901 122.161,78.91 122.161,79.057 v1(122.104,79.114) ; v1(131.285,80.257) 131.285,80.216 131.424,80.077 U1.C4@131.424,80.037
  Bottom Layer 1 w0.102: v1(122.104,79.114) 123.952,80.961 123.952,81.587 125.533,83.169 130.578,83.169 131.508,82.238 131.508,80.532 131.285,80.308 v1(131.285,80.257)
LPDDR4_DQ6_B: U1.Y4 U2.1B9 | length 18.3
  Top Layer 1 w0.102: v1(131.074,69.193) 131.131,69.136 131.221,69.136 131.37,68.987 U1.Y4@131.424,68.987
  SIG w0.102: v1(117.376,71.372) 117.433,71.315 117.72,71.315 121.194,67.84 127.892,67.84 129.148,69.096 129.422,69.096 129.633,68.885 129.633,68.8 129.456,68.623 129.456,68.429 129.515,68.37 130.437,68.37 130.53,68.277 131.239,68.277 131.445,68.483 131.445,68.821 v1(131.074,69.193)
LPDDR4_DQ7_A: U1.B4 U2.1E1 | length 17.5
  Top Layer 1 w0.102: v1(130.953,80.996) 131.01,80.939 131.171,80.939 U1.B4@131.424,80.687
  Bottom Layer 1 w0.102: v1(119.749,76.398) 119.749,76.479 119.806,76.536 119.806,76.559 120.434,77.187 120.686,77.187 120.845,77.028 120.845,76.896 120.78,76.831 120.78,76.746 120.934,76.593 121.644,76.593 121.871,76.819 122.65,76.819 122.858,77.027 122.858,77.441 122.642,77.657 122.642,78.264 124.65,80.272 124.65,80.835 126.228,82.413 130.335,82.413 130.953,81.796 v1(130.953,80.996)
LPDDR4_DQ7_B: U1.AA4 U2.1A9 | length 16.2
  Top Layer 1 w0.102: v1(131.04,68.629) 131.086,68.629 131.378,68.337 U1.AA4@131.424,68.337
  Bottom Layer 1 w0.102: v1(117.702,70.834) 117.702,69.75 119.253,68.199 119.725,68.199 119.784,68.259 119.784,68.573 119.755,68.602 119.899,68.746 129.434,68.746 129.662,68.518 130.471,68.518 130.481,68.508 130.741,68.508 130.805,68.572 130.983,68.572 v1(131.04,68.629)
LPDDR4_DQ8_A: U1.B11 U2.P2 | length 27
  Top Layer 1 w0.102: U2.P2@119.321,77.948 119.34,77.967 119.34,78.167 119.739,78.566 119.739,78.733 120.849,79.843 123.301,79.843 124.591,81.132 124.591,81.911 124.333,82.169 123.885,82.169 123.825,82.229 123.825,82.55 123.976,82.701 124.614,82.701 124.674,82.76 124.674,82.844 124.427,83.091 124.427,83.185 125.106,83.865 136.846,83.865 137.035,83.675 137.035,83.528 137.095,83.468 137.438,83.468 137.671,83.235 137.671,83.085 137.737,83.019 137.737,81.984 137.414,81.661 137.414,81.077 U1.B11@137.024,80.687
LPDDR4_DQ8_B: U1.AA11 U2.B19 | length 23.6
  Top Layer 1 w0.102: U2.B19@117.907,69.745 118.278,69.745 118.452,69.571 118.452,69.487 119.489,68.45 121.669,68.45 124.069,66.05 136.466,66.05 137.473,67.057 137.473,67.141 137.305,67.31 136.906,67.31 136.882,67.286 136.721,67.446 136.721,67.841 136.986,68.105 136.986,68.299 U1.AA11@137.024,68.337
LPDDR4_DQ9_A: U1.C11 U2.R1 | length 30.9
  Top Layer 1 w0.102: U2.R1@119.321,78.514 119.321,78.519 119.536,78.734 119.536,78.817 120.983,80.264 122.985,80.264 123.142,80.421 123.142,80.617 122.996,80.764 121.943,80.764 121.883,80.823 121.883,81.116 122.059,81.292 124.058,81.292 124.186,81.42 124.186,81.789 124.126,81.849 123.21,81.849 123.15,81.908 123.15,82.383 124.968,84.201 137.081,84.201 137.479,83.803 137.546,83.803 138.176,83.172 138.176,81.049 138.116,80.989 137.698,80.989 137.512,80.803 137.512,80.525 U1.C11@137.024,80.037
LPDDR4_DQ9_B: U1.Y11 U2.A19 | length 25.2
  Top Layer 1 w0.102: U2.A19@118.189,69.462 119.447,68.204 121.153,68.204 123.571,65.786 136.845,65.786 138.426,67.367 138.426,68.271 138.012,68.684 137.696,68.684 137.394,68.987 137.115,68.987 137.077,68.948 137.077,68.934 U1.Y11@137.024,68.987 ; v1(137.049,68.819) U1.Y11@137.049,68.961
LPDDR4_DQ10_A: U1.E11 U2.R2 | length 31
  Top Layer 1 w0.102: U2.R2@119.038,78.231 119.038,78.652 125.011,84.625 137.653,84.625 138.747,83.531 138.747,82.55 138.747,82.144 cw(c138.569,82.144) 138.569,81.966 138.557,81.966 ccw(c138.557,81.788) 138.557,81.61 138.696,81.61 cw(c138.696,81.432) 138.696,81.255 138.557,81.255 ccw(c138.557,81.077) 138.557,80.899 138.696,80.899 cw(c138.696,80.721) 138.696,80.543 138.545,80.543 ccw(c138.545,80.366) 138.545,80.188 138.569,80.188 cw(c138.569,80.01) 138.747,80.01 138.747,79.681 138.747,79.438 138.586,79.277 138.141,79.277 137.904,79.039 137.318,79.039 U1.E11@137.024,78.745
LPDDR4_DQ10_B: U1.V11 U2.A20 | length 25.3
  Top Layer 1 w0.102: U2.A20@117.907,69.18 117.907,69.178 118.618,68.467 118.618,67.189 v1(118.579,67.15) ; v1(136.866,70.077) 136.866,70.103 136.978,70.215 136.979,70.215 137.024,70.259 U1.V11@137.024,70.287
  SIG w0.102: v1(118.579,67.15) 118.603,67.15 118.84,66.913 123.362,66.913 124.615,65.659 134.944,65.659 137.401,68.116 137.401,69.222 137.317,69.306 137.317,69.685 136.926,70.077 v1(136.866,70.077)
LPDDR4_DQ11_A: U1.F11 U2.T2 | length 31
  Top Layer 1 w0.102: U2.T2@118.755,78.513 118.755,78.843 119.04,79.127 119.04,79.162 124.841,84.963 138.049,84.963 139.199,83.813 139.199,79.337 138.433,78.572 138.118,78.572 137.981,78.434 137.364,78.434 U1.F11@137.024,78.094
LPDDR4_DQ11_B: U1.U11 U2.B20 | length 24.8
  Top Layer 1 w0.102: U2.B20@117.624,69.463 117.62,69.459 117.62,69.093 118.237,68.477 v1(118.237,68.072) ; U1.U11@137.024,70.937 137.424,70.537 v1(137.424,70.077)
  SIG w0.102: v1(118.237,68.072) 119.078,67.231 128.362,67.231 128.427,67.166 131.389,67.143 131.471,67.12 cw(c131.305,66.533) 131.619,67.056 131.671,67.056 131.977,67.056 132.39,67.143 133.546,67.196 134.932,68.581 135.28,68.581 135.284,68.578 135.474,68.578 135.68,68.785 135.68,69.077 135.652,69.105 135.652,69.468 135.788,69.604 135.788,70.483 135.865,70.56 136.459,70.56 136.473,70.545 136.511,70.545 136.627,70.429 137.072,70.429 v1(137.424,70.077)
LPDDR4_DQ12_A: U1.F9 U2.M1 | length 31.4
  Top Layer 1 w0.102: U2.M1@120.169,77.665 120.169,77.67 120.51,78.011 120.51,78.103 121.055,78.648 121.055,78.687 121.533,79.165 v1(121.605,79.165) ; U1.F9@135.424,78.087 135.477,78.087 135.569,78.178 135.679,78.178 v1(135.736,78.235)
  SIG w0.102: v1(121.605,79.165) 121.907,79.466 122.855,79.466 123.373,79.984 123.373,80.464 124.206,81.296 126.152,81.296 127.422,80.026 128.052,80.026 128.207,79.871 129.684,79.871 130.208,80.396 130.732,80.396 130.939,80.189 130.939,80.104 131.287,79.756 132.788,79.756 133.018,79.525 133.018,75.828 133.286,75.56 133.848,75.56 135.098,76.809 135.098,76.975 135.687,77.564 135.978,77.564 136.185,77.357 136.185,77.243 136.244,77.184 137.699,77.184 138.112,76.771 138.604,76.771 138.738,76.904 138.738,77.592 138.606,77.724 138.002,77.724 137.627,78.099 136.725,78.099 136.48,77.854 136.069,77.854 135.736,78.187 v1(135.736,78.235)
LPDDR4_DQ12_B: U1.U9 U2.A15 | length 25.1
  Top Layer 1 w0.102: U2.A15@119.321,70.594 119.647,70.594 120.531,69.71 123.114,69.71 124.005,68.819 125.11,68.819 125.476,68.453 125.476,67.528 125.622,67.382 125.874,67.382 125.933,67.441 125.933,68.429 126.089,68.585 126.311,68.585 126.466,68.43 126.466,67.652 126.966,67.152 132.972,67.152 133.158,67.339 133.158,68.515 133.379,68.736 133.379,70.837 133.788,71.247 135.738,71.247 135.89,71.095 135.89,70.866 135.763,70.739 135.654,70.739 135.456,70.937 U1.U9@135.424,70.937
LPDDR4_DQ13_A: U1.E9 U2.1F2 | length 30.7
  SIG w0.102: v1(118.639,76.466) 118.605,76.501 118.287,76.501 118.016,76.771 118.016,77.239 118.872,78.095 118.872,79.756 122.167,83.051 135.752,83.051 136.288,82.515 137.322,82.515 138.16,81.677 138.16,80.004 138.401,79.763 138.401,79.471 138.207,79.277 138.141,79.277 137.589,78.724 135.877,78.724 ; v1(135.597,78.717) 135.605,78.725 135.876,78.725
LPDDR4_DQ13_B: U1.V9 U2.B15 | length 24.8
  Top Layer 1 w0.102: U2.B15@119.038,70.877 119.038,70.402 119.217,70.223 119.217,70.209 119.947,69.479 122.697,69.479 124.485,67.691 124.689,67.691 124.749,67.751 124.749,67.835 124.345,68.239 124.345,68.323 124.404,68.382 124.706,68.382 125.044,68.044 125.044,67.252 125.367,66.928 133.349,66.928 133.829,67.408 133.829,67.498 134.107,67.777 134.262,67.777 134.321,67.717 134.321,67.519 133.985,67.183 133.985,66.988 134.045,66.928 134.533,66.928 134.975,67.371 134.975,68.934 134.927,68.983 134.927,69.846 135.133,70.052 135.189,70.052 U1.V9@135.424,70.287
LPDDR4_DQ14_A: U1.C9 U2.1F1 | length 25
  SIG w0.102: v1(119.21,76.938) 119.267,76.88 119.551,76.88 119.613,76.818 119.731,76.818 119.791,76.878 119.791,76.962 119.634,77.119 119.634,77.306 119.942,77.614 119.942,79.175 120.269,79.502 120.396,79.502 120.777,79.883 120.777,80.264 120.904,80.391 121.793,80.391 121.92,80.518 121.92,81.026 122.428,81.534 122.428,81.788 122.774,82.134 131.607,82.134 132.571,81.17 132.743,81.17 132.933,81.359 132.933,81.443 132.715,81.661 132.588,81.661 132.376,81.873 132.376,81.957 132.461,82.042 132.842,82.042 133.333,81.551 133.417,81.551 133.477,81.61 133.477,81.788 133.265,82 133.265,82.084 133.35,82.169 133.594,82.169 133.858,81.905 133.858,81.779 134.623,81.015 134.623,80.634 134.585,80.596 134.585,80.216 134.791,80.009 135.396,80.009 v1(135.424,80.037)
LPDDR4_DQ14_B: U1.Y9 U2.1C10 | length 24.6
  SIG w0.102: v1(116.478,71.405) 116.457,71.384 116.457,70.912 116.564,70.805 116.564,70.766 116.985,70.346 116.985,70.307 117.191,70.1 117.441,70.1 120.108,67.434 128.446,67.434 128.511,67.369 131.432,67.346 131.474,67.345 131.553,67.307 cw(c131.305,66.533) 131.671,67.259 131.893,67.259 132.091,67.457 132.227,67.641 132.247,67.668 132.247,68.183 132.201,68.23 132.201,69.712 132.593,70.104 133.096,70.104 133.35,69.85 133.35,69.16 133.525,68.986 134.213,68.986 134.493,69.266 134.553,69.326 135.118,69.326 135.271,69.173 135.271,68.988 v1(135.328,68.931)
LPDDR4_DQ15_A: U1.B9 U2.1G2 | length 25.5
  Top Layer 1 w0.102: v1(134.937,80.362) 134.994,80.419 135.156,80.419 U1.B9@135.424,80.687
  SIG w0.102: v1(118.383,76.948) 118.396,76.962 118.736,76.962 119.602,77.828 119.602,79.597 119.761,79.756 120.015,79.756 120.396,80.137 120.396,80.391 120.65,80.645 120.904,80.645 121.158,80.899 121.158,81.374 121.318,81.534 121.92,81.534 122.174,81.788 122.174,82.169 122.451,82.446 134.978,82.446 135.631,81.793 135.631,81.709 135.455,81.534 135.255,81.534 134.791,81.998 134.547,81.998 134.439,81.89 134.439,81.572 135.085,80.926 135.085,80.793 134.994,80.703 134.994,80.419 v1(134.937,80.362)
LPDDR4_DQ15_B: U1.AA9 U2.B16 | length 25
  Top Layer 1 w0.102: U2.B16@118.755,70.594 118.774,70.575 118.774,70.378 119.014,70.139 119.014,70.087 119.885,69.217 122.393,69.217 124.322,67.287 124.6,67.287 125.394,66.493 134.565,66.493 135.238,67.166 135.322,67.166 135.382,67.107 135.382,66.929 135.001,66.548 135.001,66.369 135.061,66.309 136.154,66.309 136.214,66.369 136.214,66.523 136.154,66.583 135.705,66.583 135.646,66.642 135.646,66.726 136.102,67.183 136.102,67.351 136.016,67.436 136.016,67.458 135.921,67.553 135.921,68.817 135.859,68.879 135.775,68.879 135.618,68.723 135.618,68.57 135.424,68.375 U1.AA9@135.424,68.337
LPDDR4_DQS0_A_N: U1.E3 U2.H1 | length 19.2
  Top Layer 1 w0.102: U2.H1@121.301,76.534 121.32,76.553 121.32,76.631 121.505,76.816 121.662,76.816 121.912,77.066 122.042,77.066 122.276,77.301 v1(122.276,77.791)
  SIG w0.102: v1(122.276,77.791) 122.885,78.4 122.885,78.574 123.436,79.126 123.698,79.126 123.863,79.126 ccw(c123.863,79.558) 124.295,79.558 124.295,80.407 cw(c124.498,80.407) 124.701,80.407 124.701,78.463 ccw(c125.133,78.463) 125.565,78.463 125.565,80.407 cw(c125.768,80.407) 125.971,80.407 125.971,79.558 ccw(c126.403,79.558) 126.403,79.126 126.914,79.126 127.244,79.126 cw(c127.244,78.986) 127.384,78.986 127.384,78.807 ccw(c127.524,78.807) 127.663,78.807 127.663,78.986 cw(c127.803,78.986) 127.803,79.126 128.016,79.126 128.621,79.126 128.96,79.465 129.601,79.465 129.781,79.285 129.781,79.01 130.054,78.737 130.403,78.737 130.481,78.815 130.584,78.815 v1(130.641,78.872)
LPDDR4_DQS0_A_P: U1.D3 U2.H2 | length 19
  Top Layer 1 w0.102: U2.H2@121.018,76.251 U2.H2@121.014,76.253 121.014,76.648 121.411,77.045 121.567,77.045 121.917,77.395 v1(121.917,77.44)
  SIG w0.102: v1(121.917,77.44) 121.917,77.521 121.763,77.675 121.763,77.889 121.927,78.053 122.04,78.053 123.342,79.354 123.698,79.354 123.863,79.354 ccw(c123.863,79.558) 124.066,79.558 124.066,80.407 cw(c124.498,80.407) 124.93,80.407 124.93,78.463 ccw(c125.133,78.463) 125.336,78.463 125.336,80.407 cw(c125.768,80.407) 126.2,80.407 126.2,79.558 ccw(c126.403,79.558) 126.403,79.354 126.914,79.354 127.361,79.354 127.394,79.322 127.654,79.322 127.661,79.329 128.1,79.329 128.439,79.668 129.872,79.668 130.032,79.509 130.639,79.509 v1(130.681,79.55)
LPDDR4_DQS0_B_N: U1.V3 U2.A12 | length 17.5
  Top Layer 1 w0.102: U2.A12@120.169,71.442 120.192,71.42 120.192,71.298 120.453,71.038 120.67,71.038 121.036,70.673 v1(121.076,70.673)
  SIG w0.102: v1(121.076,70.673) 121.076,70.637 122.015,69.698 122.428,69.698 122.593,69.698 ccw(c122.593,69.926) 122.822,69.926 122.822,70.36 cw(c123.279,70.36) 123.736,70.36 123.736,69.705 ccw(c123.965,69.705) 124.193,69.705 124.193,70.36 cw(c124.651,70.36) 125.108,70.36 125.108,69.705 ccw(c125.336,69.705) 125.565,69.705 125.565,70.36 cw(c126.022,70.36) 126.479,70.36 126.479,69.926 ccw(c126.708,69.926) 126.708,69.698 127.893,69.698 128.064,69.698 128.529,70.162 128.657,70.162 129.667,70.162 ; 129.669,70.16 130.526,70.16 130.708,70.342 v1(130.735,70.342)
LPDDR4_DQS0_B_P: U1.W3 U2.A13 | length 17.6
  Top Layer 1 w0.102: U2.A13@119.887,71.159 119.887,71.158 120.399,70.645 120.522,70.645 v1(120.579,70.588)
  SIG w0.102: v1(120.579,70.588) 120.66,70.588 120.833,70.415 120.835,70.415 120.93,70.32 121.069,70.32 121.92,69.469 122.428,69.469 122.593,69.469 ccw(c122.593,69.926) 123.05,69.926 123.05,70.36 cw(c123.279,70.36) 123.508,70.36 123.508,69.705 ccw(c123.965,69.705) 124.422,69.705 124.422,70.36 cw(c124.651,70.36) 124.879,70.36 124.879,69.705 ccw(c125.336,69.705) 125.794,69.705 125.794,70.36 cw(c126.022,70.36) 126.251,70.36 126.251,69.926 ccw(c126.708,69.926) 126.708,69.469 127.893,69.469 128.107,69.469 128.132,69.494 128.148,69.494 128.613,69.959 129.583,69.959 129.585,69.957 130.15,69.957 130.267,69.84 v1(130.735,69.84)
LPDDR4_DQS1_A_N: U1.E10 U2.N2 | length 30.3
  Top Layer 1 w0.102: U2.N2@119.604,77.665 119.604,78.143 119.942,78.482 119.942,78.649 120.149,78.855 120.441,78.855 120.444,78.852 120.645,78.852 v1(120.703,78.794) ; v1(135.833,79.16) 135.833,79.143 136.224,78.753 U1.E10@136.224,78.737
  SIG w0.102: v1(120.703,78.794) 121.578,79.669 122.554,79.669 122.777,79.892 122.911,80.026 122.911,80.486 122.59,80.807 122.59,80.946 122.923,81.28 123.259,81.28 123.393,81.414 123.649,81.67 126.987,81.67 127.737,81.67 cw(c127.737,81.492) 127.914,81.492 127.914,80.62 ccw(c128.321,80.62) 128.321,80.213 ccw(c128.321,80.62) 128.727,80.62 128.727,81.492 cw(c128.905,81.492) 128.905,81.67 131.182,81.67 131.35,81.502 131.527,81.325 131.527,80.677 131.896,80.308 132.955,80.308 133.022,80.375 133.165,80.518 133.652,80.518 133.858,80.312 133.858,80.137 133.283,79.562 133.283,76.82 133.782,76.32 134.321,76.32 134.894,76.894 134.894,78.818 135.033,78.957 135.092,78.957 135.392,79.257 135.532,79.257 135.572,79.217 135.776,79.217 v1(135.833,79.16)